# EAGLE board Smarttree_BMS_3.1 (EAGLE 7.3.0)
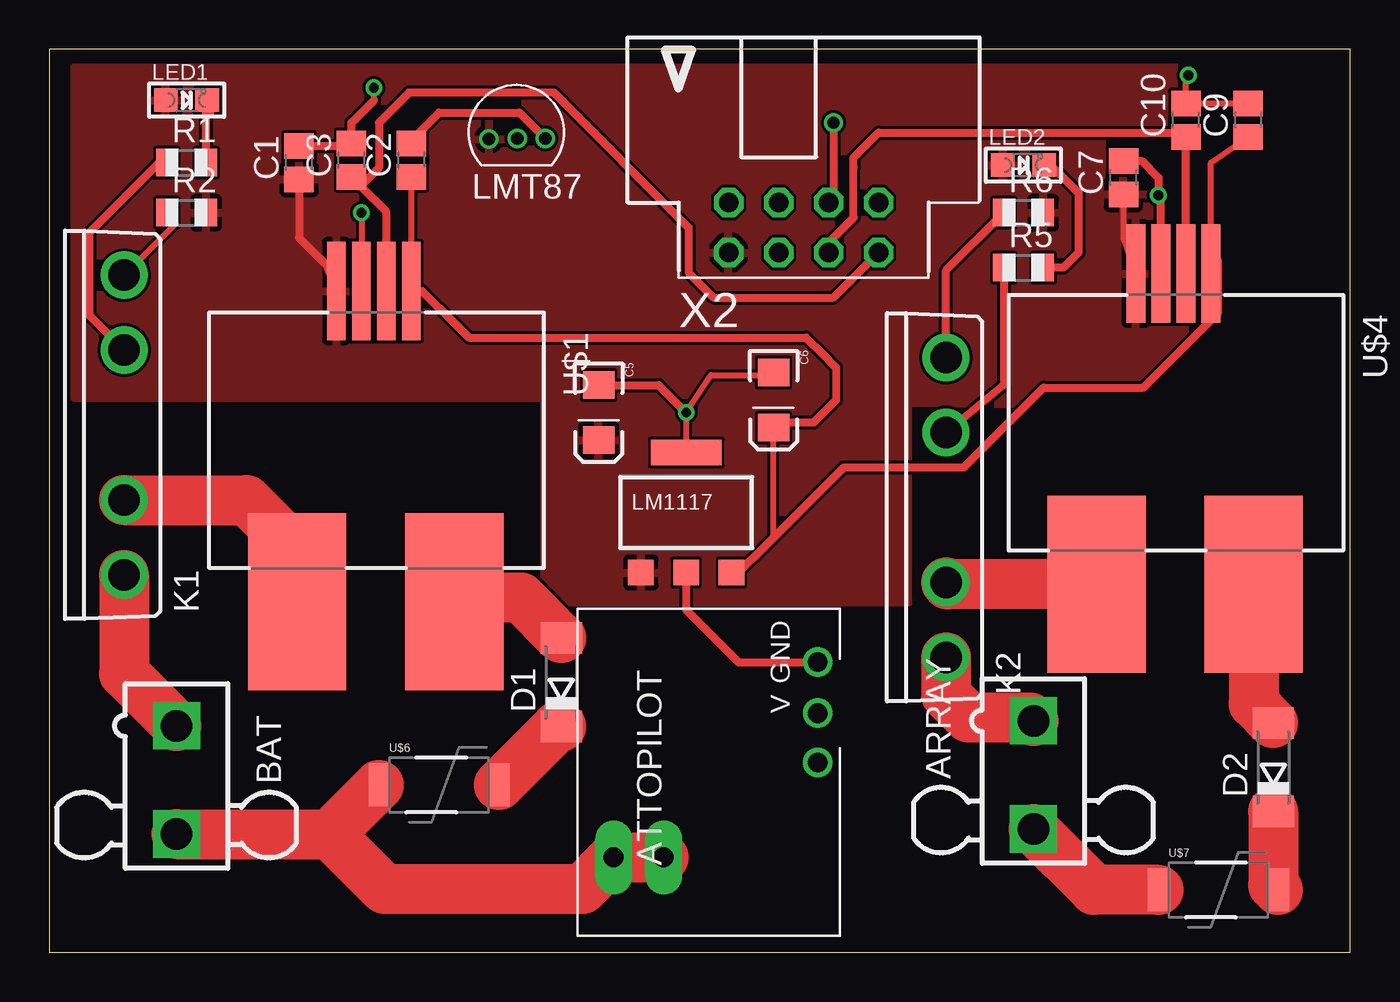
[diagram p0: board, top side]
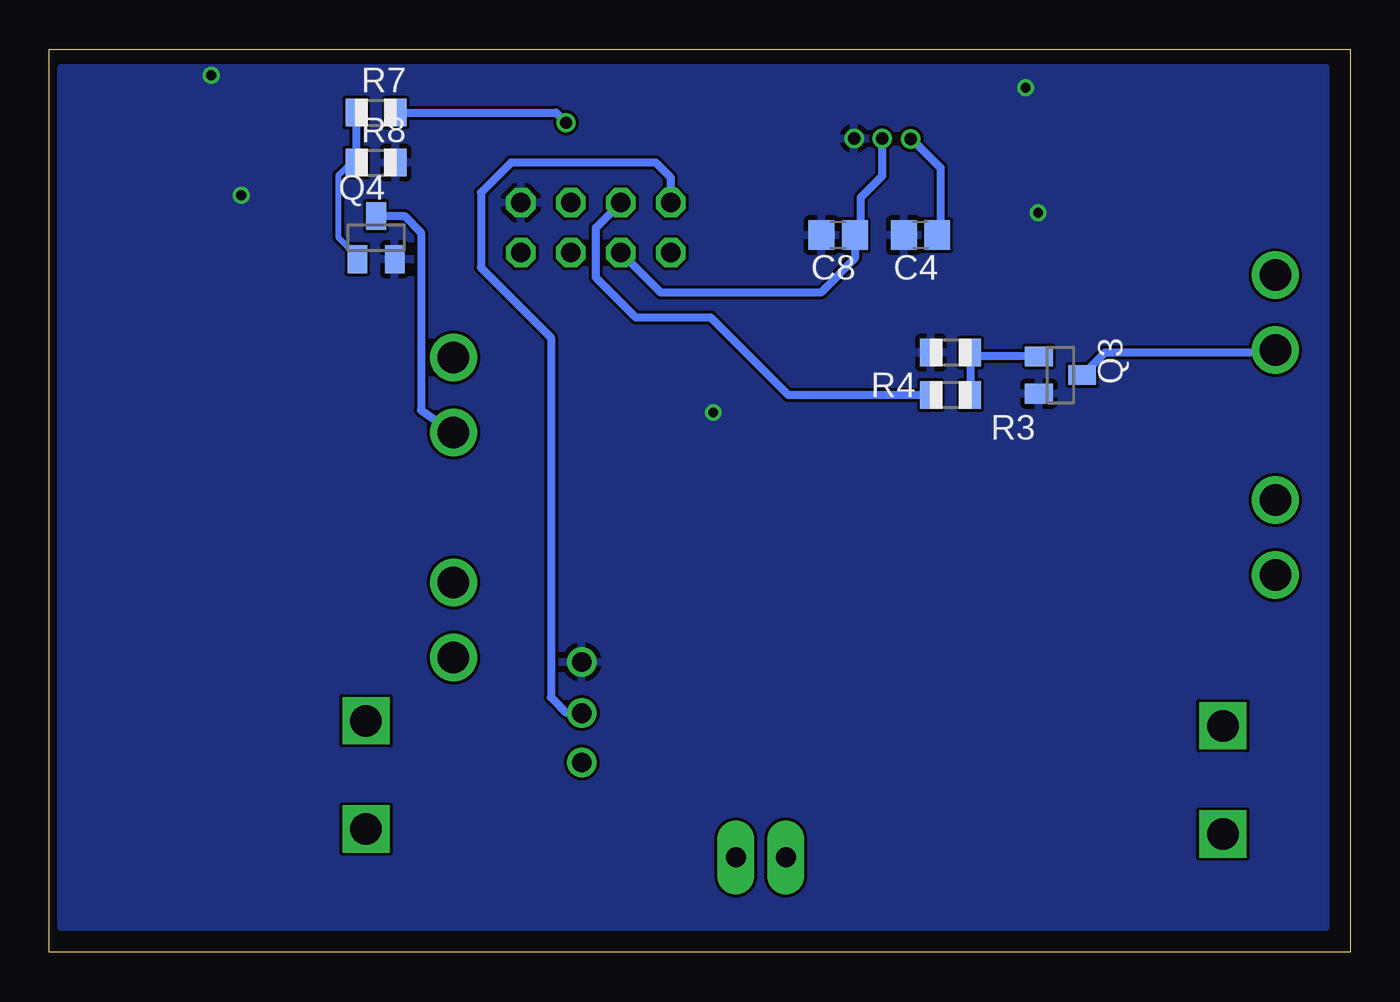
[diagram p1: board, bottom side, seen from below]

Size 66.15 x 45.9 mm. Coordinates in mm from the lower left corner, seen from the top.
Outline: 0,0 66.15,0 66.15,45.9 0,45.9 0,0
Copper layers (1*16): Top 0.0356mm / dielectric 1.5011mm / Bottom 0.0356mm
Design rules "LaenPCBOrder": minimum track width 6mil, minimum drill 13mil, track to track 6mil, track to pad 6mil, pad to pad 6mil, via to via 6mil, smd to smd 6mil, copper to edge 15mil, drill to drill 6mil, minimum pad ring 7mil, minimum via ring 7mil, stop-mask expansion 3mil, vias tented up to drill 0mil, thermal gap 10mil
Net classes: 0 default: width 0.406 mm, clearance 0.127 mm

## Footprints (pad centres in the part's own frame; a part is rotated, then mirrored left to right if it is on the bottom)
5566-2 = drill 1.6 square: 1 0,-2.75; 2 0,2.75
TH_BKOT = drill 1: GND 5.1,-4.4; IOUT 0,-4.4; VOUT 2.5,-4.4
C0805 = smd 1.3 x 1.5: 1 -0.85,0; 2 0.85,0
EIA3216 = smd 1.4 x 1.6: A 1.4,0; C -1.4,0
SOD106-R = smd 1.6 x 2.1: A 2.25,0; C -2.25,0
I4-PAC = drill 1.6 pad 2.3: 1 -7.62,0; 2 -3.81,0; 3 3.81,0; 4 7.62,0
CHIPLED_0805 = smd 1.2 x 1.2: A 0,-1.05; C 0,1.05
SOT223 = smd 1.3 x 1.3: 1 -2.3,-3.05; 2 0,-3.05; 3 2.3,-3.05 | smd 3.6 x 1.3: 4 0,3.05
LMT87_TO = drill 0.635: GND 0.305,-1.346; OUT 1.727,-1.346; VDD 3.175,-1.321
SOT23 = smd 1 x 1.4: 1 -0.95,-1.1; 2 0.95,-1.1; 3 0,1.1
R0805 = smd 1.1 x 1.4: 1 -1,0; 2 1,0
SMD_CURR_SENSE = smd 5 x 0.95: GND -8.08,-1.27; OUTPUT -8.08,0; VCC -8.08,-2.54; VREF -8.08,1.27 | smd 9 x 5: I+ 7.715,3.445; I- 7.715,-4.54
PTC-2920 = smd 1.067 x 2.184: 1 -2.032,0.638; 2 4.064,0.638
1X02_LONGPADS = drill 1.016 pad 1.88 long: 1 0,0; 2 2.54,0
057-006-0 = drill 1 octagon: 1 -2.54,-5.08; 2 -2.54,-2.54; 3 0,-5.08; 4 0,-2.54; 5 2.54,-5.08; 6 2.54,-2.54; 7 5.08,-2.54; 8 5.08,-5.08

## Placement (x,y rotation side)
ARRAY  5566-2  [5566-2]  50.04,9.02 180 top
ATTOPILOT  ATTOPILOT_VOLT  [TH_BKOT]  34.67,9.65 90 top
BAT  5566-2  [5566-2]  6.48,8.76 180 top
C1  47nF  [C0805]  12.7,40.13 90 top
C2  47nF  [C0805]  18.41,40.26 90 top
C3  4.7nF  [C0805]  15.37,40.26 90 top
C4  [C0805]  21.84,36.45 180 bottom
C5  0.1uF  [EIA3216]  27.94,27.43 270 top
C6  10uF  [EIA3216]  36.83,28.07 270 top
C7  47nF  [C0805]  54.61,39.37 90 top
C8  [C0805]  26.04,36.45 180 bottom
C9  47nF  [C0805]  60.96,42.29 90 top
C10  4.7nF  [C0805]  57.78,42.29 90 top
D1  [SOD106-R]  26.04,13.72 90 top
D2  [SOD106-R]  62.23,9.4 90 top
K1  CPC1708J  [I4-PAC]  3.81,26.8 90 top
K2  CPC1708J  [I4-PAC]  45.59,22.61 90 top
LED1  amber  [CHIPLED_0805]  6.99,43.31 270 top
LED2  blue  [CHIPLED_0805]  49.53,40.01 270 top
LM1117  LM2937_SOT223  [SOT223]  32.38,22.35 0 top
LMT87  LMT87_PAC  [LMT87_TO]  25.53,40.01 180 top
Q3  [SOT23]  14.73,29.34 270 bottom
Q4  [SOT23]  49.53,36.32 0 bottom
R1  330  [R0805]  6.99,40.13 0 top
R2  330  [R0805]  6.99,37.59 0 top
R3  330  [R0805]  20.32,28.32 180 bottom
R4  10k  [R0805]  20.32,30.48 180 bottom
R5  330  [R0805]  49.53,34.8 0 top
R6  330  [R0805]  49.53,37.59 0 top
R7  330  [R0805]  49.53,42.67 0 bottom
R8  10k  [R0805]  49.53,40.13 0 bottom
U$1  HMS-5P-SOTA  [SMD_CURR_SENSE]  17.14,25.53 270 top
U$4  HMS-5P-SOTA  [SMD_CURR_SENSE]  57.78,26.42 270 top
U$6  PTC-2920  [PTC-2920]  18.8,7.87 0 top
U$7  PTC-2920  [PTC-2920]  58.42,2.54 0 top
VS_JMP  [1X02_LONGPADS]  28.7,4.83 0 top
X2  057-006-0  [057-006-0]  37.08,40.64 0 top

## Library data of the parts
ARRAY BAT = con-molex; OC_FARNELL: 1822072; OC_NEWARK: unknown
ATTOPILOT U$1 U$4 = Francis-Project
C1-C4 C7-C10 Q3 Q4 R1-R8 = adafruit
C5 C6 = SparkFun-Retired; PROD_ID: CAP-00811
D1 D2 = diode
K1 K2 = relay
LED1 LED2 = microbuilder
LM1117 = linear2
LMT87 = nick
U$6 U$7 VS_JMP = SparkFun
X2 = con-panduit

## Nets
2.5V: C2.1 C6.A C9.1 LM1117.3 U$1.VREF U$4.VREF
ARRAY+: D2.A U$4.I+
ARRAY-: K2.2 U$4.I-
BAT+: D1.A U$1.I+
BAT-: K1.2 U$1.I-
BATIN: BAT.1 K1.1
CSI: C10.1 U$4.OUTPUT X2.5
CSO: C3.1 U$1.OUTPUT X2.8
GND: ATTOPILOT.GND C1.2 C2.2 C3.2 C4.2 C5.C C6.C C7.2 C8.2 C9.2 C10.2 LM1117.2 LM1117.4 LMT87.GND Q3.2 Q4.2 R4.2 R8.2 U$1.GND U$4.GND X2.7
N$1: K1.3 Q3.3 R1.1
N$2: K2.3 Q4.3 R5.1
N$3: LED1.C R1.2
N$4: K1.4 R2.1
N$5: LED2.C R5.2
N$6: Q3.1 R3.1 R4.1
N$7: K2.4 R6.1
N$8: Q4.1 R7.1 R8.1
N$9: BAT.2 U$6.1 VS_JMP.1 VS_JMP.2
N$10: D2.C U$7.2
N$11: D1.C U$6.2
N$12: ARRAY.2 U$7.1
N$13: ARRAY.1 K2.1
RELAY_IN: R7.2 X2.6
RELAY_OUT: R3.2 X2.4
TS: C8.1 LMT87.OUT X2.3
VCC: C1.1 C4.1 C5.A C7.1 LED1.A LED2.A LM1117.1 LMT87.VDD R2.2 R6.2 U$1.VCC U$4.VCC X2.1
VS: ATTOPILOT.VOUT X2.2

## Tracks (layer width: path | path; a pad name or v marks a point on that pad's centre or on a via)
2.5V
  Top 0.305: U$1.VREF 18.41,38.23 C2.1 | U$4.VREF 59.05,40.13 C9.1 | LM1117.3 34.92,19.18 | 36.58,20.83 36.83,21.08 36.83,26.16 C6.A
  Top 0.406: U$1.VREF 18.97,33.61 20.57,32 21.34,31.24 38.48,31.24 39.31,30.42 | 39.05,30.67 39.31,30.42 | 39.31,30.42 40.01,29.72 40.01,28.19 40.01,28.07 38.86,26.92 37.09,26.92 C6.A | U$4.VREF 59.44,35.13 59.44,32.51 57.66,30.73 55.88,28.96 55.63,28.7 50.55,28.7 46.48,24.64 40.39,24.64 39.5,23.75 | 39.88,24.13 39.5,23.75 | 39.5,23.75 36.58,20.83 34.92,19.18
ARRAY+
  Top 2.54: U$4.I+ 61.23,12.65 D2.A
ARRAY-
  Top 2.54: U$4.I- 45.69,18.7 K2.2
BAT+
  Top 2.54: U$1.I+ 20.81,18.03 23.97,18.03 D1.A
BAT-
  Top 2.54: 12.7,17.91 U$1.I- 12.19,18.23 12.19,20.83 10.03,22.99 K1.2
BATIN
  Top 2.54: K1.1 3.81,14.18 BAT.1
CSI
  Top 0.406: U$4.OUTPUT C10.1 57.57,41.66 42.16,41.66 41.66,41.15 40.89,40.39 40.89,39.88 40.89,37.34 40.64,37.08 39.62,36.07 X2.5
CSO
  Top 0.406: U$1.OUTPUT 17.14,37.63 15.83,38.95 | 15.83,38.95 C3.1 | 15.83,38.95 16.76,39.88 16.76,42.16 18.29,43.69 25.65,43.69 32.51,36.83 32.51,34.54 33.78,33.27 39.88,33.27 X2.8
GND  (via drill 0.5)
  Top 0.305: v15.88,37.59 15.88,33.78 U$1.GND | 16.51,43.31 v16.51,43.94 | C6.C 36.83,29.34 33.66,29.34 v32.38,27.43 LM1117.4 | C9.2 C10.2 57.78,44.58 v57.91,44.58
  Top 0.406: C1.2 15.24,40.98 C3.2 15.37,42.16 16.51,43.31 | C5.C 30.98,28.83 v32.38,27.43 | C2.2 18.41,41.27 19.81,42.67 23.9,42.67 LMT87.GND | LM1117.2 32.38,17.4 35.05,14.73 39.05,14.73 ATTOPILOT.GND | U$4.GND 56.52,38.35 v56.39,38.48 56.39,39.37 55.54,40.22 C7.2
  pour Bottom: 1.27,44.96 1.27,1.27 65.53,1.27 65.53,44.96
N$1
  Top 0.406: R1.1 5.59,40.13 2.03,36.58 2.03,32.38 K1.3
  Bottom 0.406: K1.3 4.19,30.61 4.32,30.48 12.49,30.48 Q3.3
N$2
  Top 0.406: R5.1 48.53,28.84 K2.3
  Bottom 0.406: Q4.3 48.09,37.42 47.24,36.58 47.24,27.56 K2.3
N$3
  Top 0.305: LED1.C 8.26,42.67
  Top 0.406: R1.2 7.99,43.26 LED1.C
N$4
  Top 0.305: R2.1 6.35,36.96 K1.4
N$5
  Top 0.406: LED2.C 50.93,40.01 52.32,38.61 52.32,35.56 51.56,34.8 R5.2
N$6
  Bottom 0.406: R4.1 19.32,29.97 | 19.32,29.97 R3.1 | Q3.1 19,30.29 19.32,29.97
N$7
  Top 0.406: K2.4 45.59,34.66 R6.1
N$8
  Bottom 0.305: R8.1 50.8,40.13 51.44,39.5 51.44,36.32 50.35,35.24 50.16,35.05
  Bottom 0.406: Q4.1 50.38,35.22 50.35,35.24 | R7.1 R8.1
N$9
  Top 2.54: VS_JMP.2 VS_JMP.1 27.09,3.22 17.06,3.22 14.27,6.01 | BAT.2 14.27,6.01 | 14.27,6.01 U$6.1
N$10
  Top 2.54: D2.C 62.23,3.43 U$7.2
N$11
  Top 2.54: D1.C 25.81,11.47 U$6.2
N$12
  Top 2.54: U$7.1 53.13,3.18 ARRAY.2
N$13
  Top 2.54: K2.1 45.59,13.08 46.74,11.94 49.87,11.94 ARRAY.1
RELAY_IN  (via drill 0.6)
  Top 0.406: v39.88,42.16 39.88,38.35 X2.6
  Bottom 0.406: R7.2 40.39,42.67 v39.88,42.16
RELAY_OUT
  Bottom 0.406: R3.2 28.57,28.32 32.51,32.26 36.32,32.26 38.1,34.04 38.35,34.29 38.35,36.83 X2.4
TS
  Bottom 0.406: LMT87.OUT 23.8,39.45 24.89,38.35 24.89,36.74 C8.1 25.18,35.27 26.92,33.53 35.05,33.53 X2.3
VCC
  Top 0.305: 13.97,35.05 U$1.VCC | C7.1 54.61,36.32 U$4.VCC
  Top 0.406: C1.1 12.7,36.32 13.97,35.05 | U$1.VCC 14.61,33.4 14.73,33.27
  Bottom 0.406: LMT87.VDD 22.28,41.33 20.83,39.88 20.83,36.62 C4.1
  pour Top: 1.27,44.96 1.27,28.19 25.15,28.19 25.15,17.78 43.69,17.78 43.69,27.94 65.53,27.69 65.53,44.96
VS
  Bottom 0.406: ATTOPILOT.VOUT 39.84,12.15 40.51,12.83 40.64,12.95 40.64,31.24 44.2,34.8 44.2,38.61 42.67,40.13 35.31,40.13 34.54,39.37 X2.2